# Altium PCB 顶板.PcbDoc
Units mil, origin at the board's own origin, x right, y up, seen from the top; angles counter-clockwise.
Board outline 3937.01 x 2732.13 mil, 2 copper layers (Top Layer, Bottom Layer); 55 components, 55 nets, 253 pads, 65 vias.
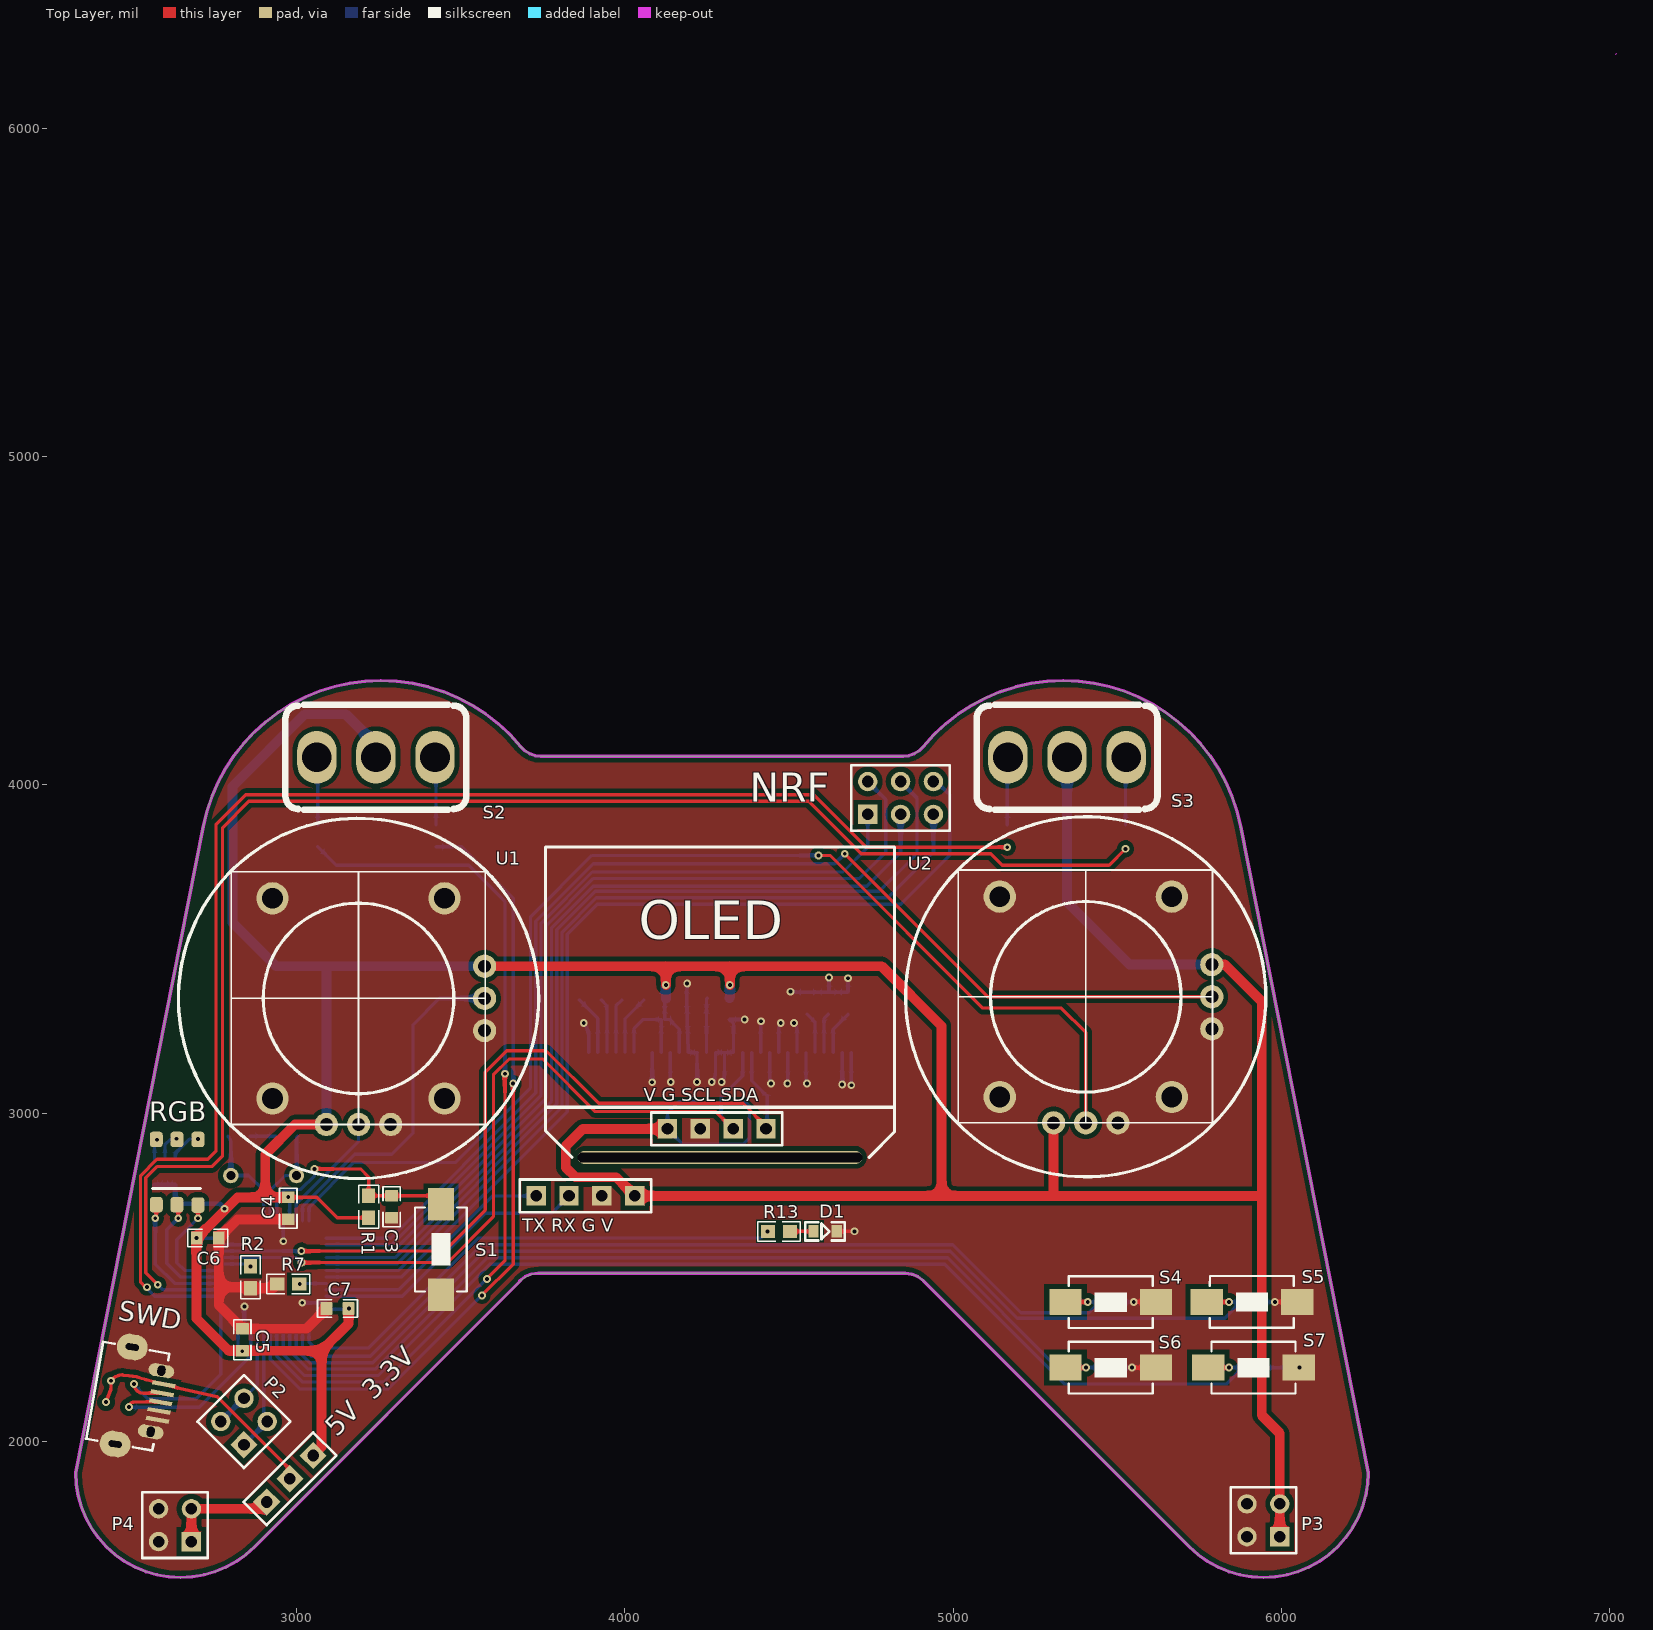
[diagram p0: Top Layer view]
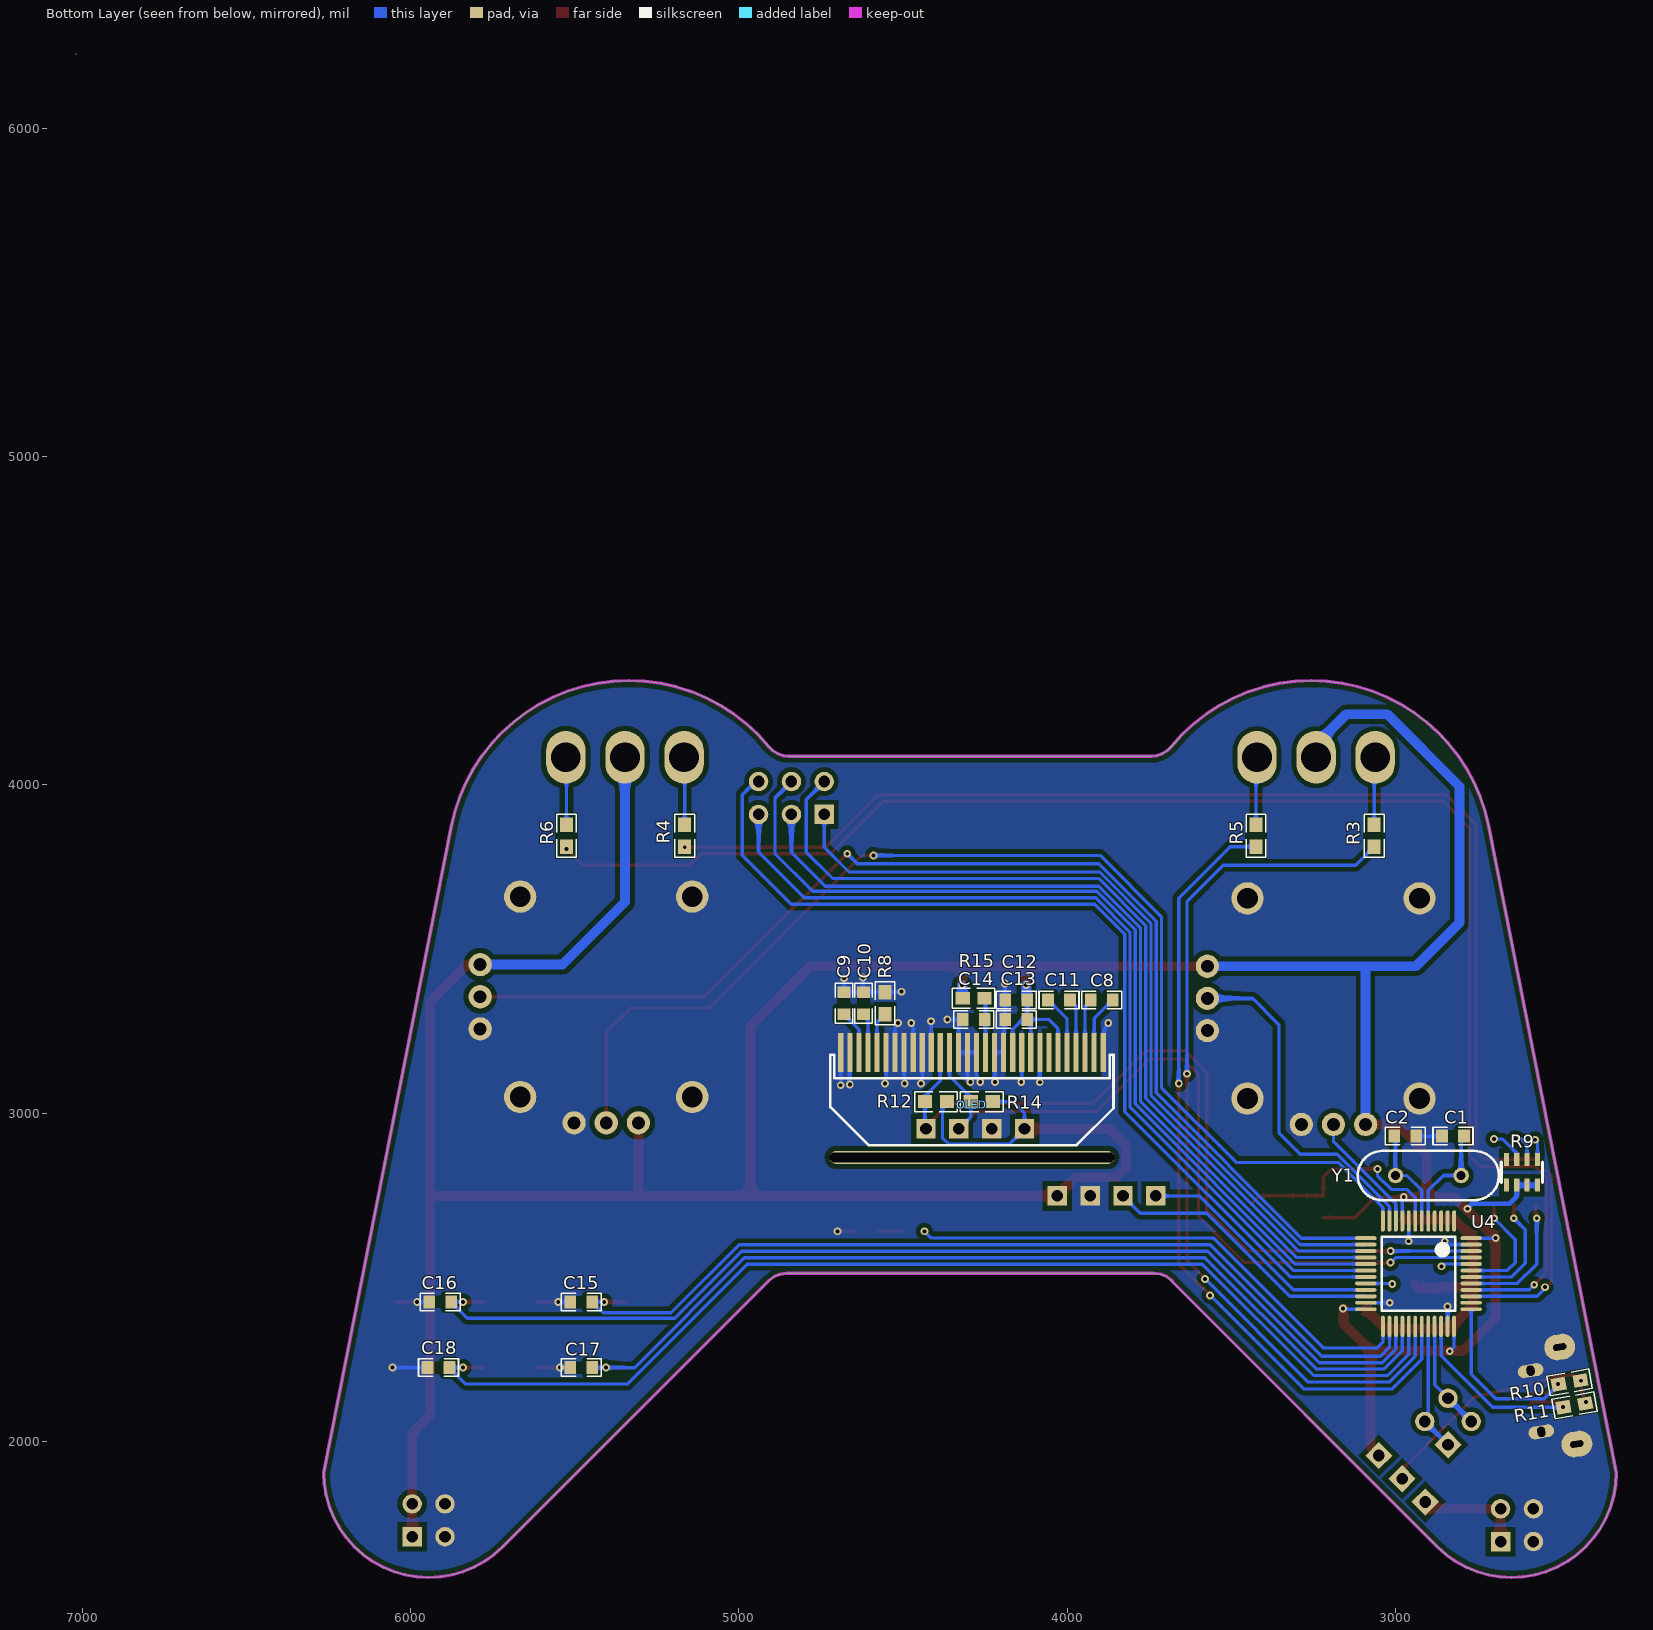
[diagram p1: Bottom Layer view, seen from below]

## Layer stack, top to bottom
Top Solder: solder mask 0.4, Solder Resist, Dk 3.5
Top Layer: signal copper 1.4
Dielectric 1: dielectric 12.6, FR-4, Dk 4.8
Bottom Layer: signal copper 1.4
Bottom Solder: solder mask 0.4, Solder Resist, Dk 3.5

## Board outline
2476.85,1634.61 2508.19,1617.3 2541.26,1603.6 2575.66,1593.69 2610.95,1587.69 2646.69,1585.69 2682.43,1587.69 2717.72,1593.69 2752.12,1603.6 2785.19,1617.3 2816.52,1634.61 2845.72,1655.33 2872.41,1679.18 3682.36,2489.13 3698.67,2501.65 3717.66,2509.51 3738.04,2512.2 4853.91,2512.2 4874.29,2509.51 4893.28,2501.65 4909.59,2489.13 5719.54,1679.18 5746.23,1655.33 5775.43,1634.61 5806.76,1617.3 5839.83,1603.6 5874.23,1593.69 5909.52,1587.69 5945.26,1585.69 5981,1587.69 6016.29,1593.69 6050.69,1603.6 6083.77,1617.3 6115.1,1634.61 6144.29,1655.33 6170.98,1679.18 6194.84,1705.87 6215.55,1735.07 6232.87,1766.4 6246.57,1799.47 6256.48,1833.87 6262.47,1869.16 6264.48,1904.9 5875.78,3873.41 5864.61,3919.45 5849.53,3964.37 5830.65,4007.83 5808.1,4049.5 5782.06,4089.08 5752.71,4126.28 5720.28,4160.83 5685.01,4192.46 5647.14,4220.94 5606.97,4246.07 5564.79,4267.65 5520.91,4285.53 5475.66,4299.57 5429.37,4309.68 5382.38,4315.78 5335.04,4317.81 5286.35,4315.66 5238.03,4309.21 5190.48,4298.52 5144.05,4283.67 5099.12,4264.77 5056.03,4241.98 5015.13,4215.47 4976.73,4185.45 4941.13,4152.16 4908.61,4115.85 4896.18,4103.7 4881.39,4094.58 4864.96,4088.92 4847.69,4087 3744.26,4087 3726.99,4088.92 3710.56,4094.58 3695.77,4103.7 3683.34,4115.85 3650.82,4152.16 3615.22,4185.45 3576.82,4215.47 3535.92,4241.98 3492.83,4264.77 3447.9,4283.67 3401.47,4298.52 3353.92,4309.21 3305.61,4315.66 3256.91,4317.81 3209.57,4315.78 3162.58,4309.68 3116.29,4299.57 3071.04,4285.53 3027.16,4267.65 2984.98,4246.07 2944.81,4220.94 2906.95,4192.46 2871.67,4160.83 2839.24,4126.28 2809.89,4089.08 2783.85,4049.5 2761.3,4007.83 2742.42,3964.37 2727.34,3919.45 2716.17,3873.41 2327.47,1904.9 2329.48,1869.16 2335.48,1833.87 2345.39,1799.47 2359.08,1766.4 2376.4,1735.07 2397.11,1705.87 2420.97,1679.18 2447.66,1655.33

## Design rules (kind name [scope] priority, off if disabled: settings)
Clearance [All] p1: gap=6
HoleSize [All] p1: absolutevalues=TRUE maxlimit=1000 minlimit=1 maxpercent=80.000 minpercent=20.000
HoleToHoleClearance [All] p1: gap=0 allowstackedmicrovias=TRUE
MinimumSolderMaskSliver [All] p1: minsoldermaskwidth=0
PolygonConnect [All] p1: connectstyle=Direct reliefconductorwidth=10 reliefentries=4 polygonreliefangle="90 Angle" airgapwidth=10
RoutingVias [All] p1: holewidth=28 width=50 viastyle="Through Hole" minholewidth=28 minwidth=50 maxholewidth=28 maxwidth=50
SilkToSilkClearance [All] p1: silktosilkclearance=0
SilkToSolderMaskClearance [IsPad] p1: minsilkscreentomaskgap=0 clearancetoexposedcopper=TRUE
SolderMaskExpansion [All] p1: expansion=4
Width [All] p1: maxlimit=100 minlimit=10 preferedwidth=10
25 further rules are at their usual default settings.

## Components (designator, comment, footprint, x,y, rotation, side; value= is the part's Value field where it differs from the comment)
"5V  3.3V" "H3" H3 2980,1885 r225 top (schematic designator H2)
C1 "CAP0603" CAP0603 2825,2930 r0 bottom
C2 "CAP0603" CAP0603 2970,2930 r180 bottom
C3 "CAP0603" CAP0603 3290,2715 r90 top
C4 "CAP0603" CAP0603 2975,2710 r90 top
C5 "CAP0603" CAP0603 2835,2310 r270 top
C6 "CAP0603" CAP0603 2730,2620 r180 top
C7 "CAP0603" CAP0603 3125,2405 r0 top
C8 "CAP0603" CAP0603 3895,3345 r180 bottom
C9 "CAP0603" CAP0603 4680,3335 r270 bottom
C10 "CAP0603" CAP0603 4620,3335 r270 bottom
C11 "CAP0603" CAP0603 4025,3345 r180 bottom
C12 "CAP0603" CAP0603 4155,3345 r0 bottom
C13 "CAP0603" CAP0603 4155,3285 r0 bottom
C14 "CAP0603" CAP0603 4285,3285 r180 bottom
C15 "CAP0603" CAP0603 5480,2424.68 r0 bottom
C16 "CAP0603" CAP0603 5910,2425 r0 bottom
C17 "CAP0603" CAP0603 5480,2225 r0 bottom
C18 "CAP0603" CAP0603 5915,2225 r0 bottom
D1 "LED" LED_0603_B 4610,2640 r0 top
NRF "Header 3X2" HDR2X3 4740,3910 r0 top (schematic designator P1)
OLED "OLED" OLED 4290,3025 r180 top (schematic designator U3)
P2 "Header 2X2" HDR2X2 2840,1990 r45 top
P3 "Header 2X2" HDR2X2 5995,1710 r90 top
P4 "Header 2X2" HDR2X2 2680,1695 r90 top
R1 "电阻R" R0603 3220,2715 r270 top
R2 "电阻R" R0603 2860,2500 r270 top
R3 "电阻R" R0603 3065,3845 r90 bottom
R4 "电阻R" R0603 5165,3845 r90 bottom
R5 "电阻R" R0603 3425,3845 r90 bottom
R6 "电阻R" R0603 5525,3845 r90 bottom
R7 "电阻R" R0603 2975,2480 r180 top
R8 "电阻R" R0603 4555,3335 r270 bottom
R9 "1K*4排阻" 1K*4排阻 2615,2820 r0 bottom
R10 "电阻R" R0603 2470,2180 r170 bottom
R11 "电阻R" R0603 2455,2110 r170 bottom
R12 "电阻R" R0603 4400,3035 r0 bottom
R13 "电阻R" R0603 4470,2640 r0 top
R14 "电阻R" R0603 4260,3035 r180 bottom
R15 "电阻R" R0603 4285,3350 r0 bottom
RGB "RGB5050" RGB5050 2640,2840 r90 top (schematic designator *2)
S1 "SWITCH" SWITCH 3440,2585 r0 top
S2 "拨动开关" 拨动开关 3240,4085 r180 top
S3 "拨动开关" 拨动开关 5345,4085 r180 top
S4 "SWITCH" SWITCH 5480,2424.68 r270 top
S5 "SWITCH" SWITCH 5910,2425 r270 top
S6 "SWITCH" SWITCH 5480,2225 r270 top
S7 "SWITCH" SWITCH 5915,2225 r270 top
SWD "MicroUSB（直插）" MicroUSB（直插） 2530,2130 r80 top (schematic designator *1)
"TX RX G V" "H4" H4 3880,2745 r180 top (schematic designator H3)
U1 "遥控器摇杆" 遥控器摇杆 3250,3310 r0 top
U2 "遥控器摇杆" 遥控器摇杆 5465,3315 r0 top
U4 "STM32F103C8T6" LQFP_48P 2930,2510 r270 bottom
"V G SCL SDA" "H4" H4 4280,2955 r0 top (schematic designator H1)
Y1 "XTAL" XTAL 2900,2810 r180 bottom

## Footprints (in the part's own frame and the unit in brackets; to place one, negate y for a bottom-side part, rotate by r counter-clockwise, add the part's x,y. Pads: shape width x height; smd on the part's side, far side on the other; paste and mask are expansions set on the pad)
1K*4排阻 [mm]
  rect 0.4x1 smd: 1(-1.2,1) 2(-1.2,-1) 3(-0.4,1) 4(-0.4,-1) 5(0.4,1) 6(0.4,-1) 7(1.2,1) 8(1.2,-1)
  silkscreen extent -1.6,-0.8 1.6,0.8, body extent -1.6,-0.84 1.6,0.84, height 0.5
CAP0603 [mm]
  round 0.254 on Mech14: 0(0,0)
  rrect10% 0.9x1 smd: 1(-0.85,0) 2(0.85,0)
  Top Layer pour cut-out: -0.5,0.5 0.5,0.5 0.5,-0.5 -0.5,-0.5
  silkscreen extent -1.55,-0.67 1.55,0.67, body extent -0.85,-0.45 0.85,0.45, height 0.89
H3 [mm] "排针"
  rect 1.5x1.5 hole 0.9: 1(-2.565,-0.025) 2(-0.025,-0.025) 3(2.515,-0.025)
  silkscreen extent -3.84,-1.3 3.78,1.24, body extent -3.84,-1.3 3.78,1.24, height 7.58
H4 [mm] "排针"
  rect 1.5x1.5 hole 0.9: 1(-3.81,-0.076) 2(-1.27,-0.076) 3(1.27,-0.076) 4(3.81,-0.076)
  silkscreen extent -5.08,-1.35 5.08,1.19, body extent -5.08,-1.35 5.08,1.19, height 7.58
HDR2X2 [mm] "Connector; Header; 2x2 Position"
  rect 1.5x1.5 hole 0.9: 1(0,0)
  round 1.5 hole 0.9: 2(0,2.54) 3(2.54,0) 4(2.54,2.54)
  silkscreen extent -1.27,-1.27 3.81,3.81
HDR2X3 [mm] "Connector; Header; 3x2 Position"
  rect 1.5x1.5 hole 0.9: 1(0,0)
  round 1.5 hole 0.9: 2(0,2.54) 3(2.54,0) 4(2.54,2.54) 5(5.08,0) 6(5.08,2.54)
  silkscreen extent -1.27,-1.27 6.35,3.81
LED_0603_B [mm]
  rect 0.8x0.95 smd: 1(-0.9,0) 2(0.9,0)
  silkscreen extent -1.52,-0.71 1.52,0.71, body extent -0.8,-0.43 0.8,0.41, height 0.8
LQFP_48P [mm]
  oval 1.65x0.3 smd: 1(-4.1,2.75) 2(-4.1,2.25) 3(-4.1,1.75) 4(-4.1,1.25) 5(-4.1,0.75) 6(-4.1,0.25) 7(-4.1,-0.25) 8(-4.1,-0.75) 9(-4.1,-1.25) 10(-4.1,-1.75) 11(-4.1,-2.25) 12(-4.1,-2.75) 25(4.05,-2.75) 26(4.05,-2.25) 27(4.05,-1.75) 28(4.05,-1.25) 29(4.05,-0.75) 30(4.05,-0.25) 31(4.05,0.25) 32(4.05,0.75) 33(4.05,1.25) 34(4.05,1.75) 35(4.05,2.25) 36(4.05,2.75)
  oval 0.3x1.65 smd: 13(-2.775,-4.075) 14(-2.275,-4.075) 15(-1.775,-4.075) 16(-1.275,-4.075) 17(-0.775,-4.075) 18(-0.275,-4.075) 19(0.225,-4.075) 20(0.725,-4.075) 21(1.225,-4.075) 22(1.725,-4.075) 23(2.225,-4.075) 24(2.725,-4.075) 37(2.725,4.075) 38(2.225,4.075) 39(1.725,4.075) 40(1.225,4.075) 41(0.725,4.075) 42(0.225,4.075) 43(-0.275,4.075) 44(-0.775,4.075) 45(-1.275,4.075) 46(-1.775,4.075) 47(-2.275,4.075) 48(-2.775,4.075)
  silkscreen extent -2.88,-2.85 2.82,2.85, body extent -4.53,-4.5 4.47,4.5, height 1.59
MicroUSB（直插） [mm]
  rect 0.35x1.8 smd: 1(1.4,-1.45) 2(0.7,-1.45) 3(0,-1.45) 4(-0.7,-1.45) 5(-1.4,-1.45)
  oval 2x2.4 hole 0.508 slot 1.016 at 90 deg unplated: 6(-3.81,1.45) 6(3.81,1.45)
  oval 1x2 hole 0.6 slot 0.8 at 0 deg: 6(-2.4,-1.09) 6(2.4,-1.09)
  silkscreen extent -3.81,-1.47 3.81,3.74, body extent -3.78,-1.93 3.84,3.71, height 1.27
OLED [mm]
  oval 22x1 hole 0.762 slot 22 at 0 deg: 0(0,4.063)
  rect 0.4x3 smd far side: 1(10.15,-4.062) 2(9.45,-4.062) 3(8.75,-4.062) 4(8.05,-4.062) 5(7.35,-4.062) 6(6.65,-4.062) 7(5.95,-4.062) 8(5.25,-4.062) 9(4.55,-4.062) 10(3.85,-4.062) 11(3.15,-4.062) 12(2.45,-4.062) 13(1.75,-4.062) 14(1.05,-4.062) 15(0.35,-4.062) 16(-0.35,-4.062) 17(-1.05,-4.062) 18(-1.75,-4.062) 19(-2.45,-4.062) 20(-3.15,-4.062) 21(-3.85,-4.062) 22(-4.55,-4.062) 23(-5.25,-4.062) 24(-5.95,-4.062) 25(-6.65,-4.062) 26(-7.35,-4.062) 27(-8.05,-4.062) 28(-8.75,-4.062) 29(-9.45,-4.062) 30(-10.15,-4.062)
  silkscreen extent -13.5,-19.96 13.5,4.04
R0603 [mm]
  rect 1.1x1 smd: 1(-0.85,0) 2(0.85,0)
  silkscreen extent -1.65,-0.76 1.65,0.76, body extent -0.8,-0.4 0.8,0.4, height 0.45
RGB5050 [mm]
  rrect50% 1.2x1 smd: 1(-3.019,1.702) 2(-3.019,0.102) 3(-3.044,-1.523) 4(2.031,-1.523) 5(2.031,0.102) 6(2.031,1.702)
  silkscreen extent -1.77,-1.7 -1.77,2, body extent -3.22,-2.4 2.28,2.6, height 1.51
SWITCH [mm]
  rect 2x2.5 smd: 1(0,3.5) 2(0,-3.5)
  silkscreen extent -2,-3.25 2,3.25, body extent -2.03,-3.23 2.03,3.25, height 1.2
XTAL [mm]
  round 1.2 hole 0.7: 1(-2.54,0) 2(2.54,0)
  silkscreen extent -5.46,-1.91 5.46,1.91, body extent -5.7,-2.29 5.65,2.36, height 3.52
拨动开关 [mil] "扭子拨动开关"
  oval 120x160 hole 90.55: 1(-182,1) 2(-2,1) 3(178,1)
  silkscreen extent -278,-158 274,160, body extent -280,-158 277,162, height 748
遥控器摇杆 [mm] "摇杆"
  round 2.5 hole 1.6: 0(-8.204,-6.744) 0(-8.204,8.75) 0(5.105,-6.744) 0(5.105,8.75)
  round 1.8 hole 1: 1(-4.039,-8.75) 2(-1.549,-8.75) 3(0.94,-8.75) 4(8.204,-1.486) 5(8.204,1.003) 6(8.204,3.493)
  silkscreen extent -15.48,-12.93 12.38,14.94

## Part data
"5V  3.3V" "TX RX G V" "V G SCL SDA": "排针"
NRF: "Header, 3-Pin, Dual row"
P2 P3 P4: "Header, 2-Pin, Dual row"
S1 S4 S5 S6 S7: "按键"
S2 S3: "扭子拨动开关"
U1 U2: "摇杆"
Y1: "晶振"

## Via types
v1: diameter 23.62, hole 11.81, Top Layer to Bottom Layer, tented both sides, 65 vias

## Nets (pads, with @x,y where several pads share a name; then routed paths per layer and width w, separated by ;. In a path a pad name is that pad's centre, name@x,y a point inside that pad or via, vN(x,y) a via of type N, cw(c..) or ccw(c..) an arc to the next point about the centre after c; other vN are vias at no path point)
ADC123_IN0: U1.2 U4.10 | length 372.8
  Bottom Layer w10: U4.10 2998.9,2723.9 3189,2914 U1.2
ADC123_IN1: U1.5 U4.11 | length 1054.8
  Bottom Layer w10: U4.11 3018.58,2716.21 3177.37,2875 3290,2875 3355,2940 3355,3270 3434.5,3349.5 U1.5
ADC123_IN2: U2.2 U4.12 | length 3654.9
  Top Layer w10: v1(4590,3785) 4625,3785 5090,3320 5330,3320 5404,3246 U2.2
  Bottom Layer w10: U4.12 3038.27,2713.27 3175,2850 3485,2850 3713,3078 3713,3598 3900,3785 v1(4590,3785)
ADC123_IN3: U2.5 U4.13 | length 3669.3
  Top Layer w10: v1(4670,3790) 5105.5,3354.5 U2.5
  Bottom Layer w10: U4.13 3286.64,2619.27 3729,3061.63 3729,3584.76 3904.24,3760 4640,3760 v1(4670,3790)
CAN-RX: P2.1 P2.3 U4.32 | length 394.1
  Bottom Layer w10: P2.1 P2.3 2900.47,2070.95 U4.32
CAN-TX: P2.2 P2.4 U4.33 | length 336
  Bottom Layer w10: P2.2 P2.4 2880.79,2172.21 U4.33
GND: "TX RX G V.2" "V G SCL SDA.2" C1.2 C2.2 C3.1 C4.1 C5.1 C6.1 C7.1 C9.1 C10.1 C12.2 C13.2 C14.1 C15.2 C16.2 C17.2 C18.2 D1.2 OLED.1 OLED.8 OLED.10 OLED.12 OLED.13 OLED.15 OLED.16 OLED.17 OLED.20 OLED.21 OLED.22 OLED.23 OLED.24 OLED.25 OLED.29 OLED.30 P3.2 P3.4 P4.2 P4.4 R2.2 R7.2 R8.1 S1.2 S4.1 S5.1 S6.1 S7.1 SWD.4 SWD.5 SWD.6 U1.0 U1.3 U1.4 U2.0 U2.3 U2.4 U4.8 U4.23 U4.35 U4.47 | length 3884.4
  Top Layer w10: SWD.6@2588.67,2215.6 SWD.6@2606.26,2205.12 ; D1.2 v1(4700,2640) ; v1(5545,2225) S6.1 ; v1(5550,2425) 5617.48,2425 S4.1 ; v1(5980,2425) S5.1
  Top Layer w30: R7.2 2928.07,2466.54 R2.2 2856.54,2470 2763.46,2470 ; C4.1 2820,2676.54 C6.1 2763.46,2470 ; C7.1 3030,2343.46 C5.1 2763.46,2415 2763.46,2470
  Bottom Layer w10: U4.47 2839.58,2599.58 v1(2850,2610) ; U4.35 v1(2841.42,2411.42) ; C1.2 C2.2 ; U4.8 2959.53,2610.47 v1(2960,2610) ; v1(3017.58,2422.42) U4.23 ; v1(3875,3275) cw(c3837.84,3237.84) 3890.39,3237.84 OLED.1 ; OLED.8 v1(4083.31,3094.09) ccw(c4089.09,3094.09) v1@4085,3090 ; OLED.10 4138.43,3098.8 ccw(c4143.8,3098.8) v1(4140,3095) ; v1(4190,3395) ccw(c4193.71,3391.29) 4188.46,3391.29 C12.2 4190.37,3285.06 OLED.12 OLED.13 ccw(c4223.76,3182.28) 4220,3182.28 v1(4220,3095) ; v1(4265,3095) ccw(c4237.91,3122.09) 4276.22,3122.09 OLED.15 OLED.16 ; v1(4295,3095) ccw(c4273.8,3116.2) 4303.78,3116.2 OLED.16 ; v1(4365,3285) C14.1 4331.34,3272.13 OLED.17 OLED.16 ; OLED.20 4414.02,3277.62 cw(c4417.38,3277.62) v1(4415,3280) ; OLED.21 4441.57,3098.27 ccw(c4453.27,3098.27) v1(4445,3090) ; OLED.22 4469.13,3260.84 cw(c4489.16,3260.84) v1(4475,3275) ; v1(4495,3090) ccw(c4490.91,3094.09) 4496.69,3094.09 OLED.23 ; v1(4505,3370) ccw(c4508.71,3373.71) 4508.71,3368.46 R8.1 C9.1 v1(4680,3411) ; v1(4515,3275) cw(c4492.66,3252.66) 4524.25,3252.66 OLED.24 ; OLED.25 4551.81,3097.7 ccw(c4562.7,3097.7) v1(4555,3090) ; C10.1 4622,3370.46 v1(4622,3413) ; v1(4662.05,3087.13) OLED.29 ; OLED.30 4689.61,3085.95 ccw(c4690.95,3085.95) v1(4690,3085) ; C17.2 v1(5545,2225) ; C15.2 5544.69,2424.68 v1@5545,2425 ; C16.2 v1(5980,2425) ; C18.2 v1(6055,2225)
LED: R13.1 U4.25 | length 1599.5
  Bottom Layer w10: U4.25 3038.27,2301.73 3055,2285 3220,2285 3555,2620 4415,2620 v1(4435,2640)
Net*1_1: "5V  3.3V.2" R10.2 R11.2 SWD.1 | length 746.7
  Top Layer w10: v1(2420,2120) 2434,2158 2435,2166 v1(2435,2185) 2445,2195 2448,2197 2451,2198 2455,2200 2460,2202 2469,2203 2472,2202 2478,2201 2490,2200 2501,2199 2508,2198 2513,2197 2529,2192 2536,2190 2538,2189 2542,2188 2558,2184 SWD.1 2629,2165 2758.5,2136.5 2980,1915 2980,1886.41
Net*2_4: R9.6 RGB.4 | length 105.5
  Bottom Layer w10: R9.6 2630.75,2877.75 2674,2921 v1(2700,2921)
Net*2_5: R9.4 RGB.5 | length 87.4
  Bottom Layer w10: R9.4 2599.25,2903.25 2618,2922 v1(2635,2922)
Net*2_6: R9.2 RGB.6 | length 60.8
  Bottom Layer w10: R9.2 2567.76,2912.76 v1@2573,2918
  other v1: 2575,2919
NetC1_1: C1.1 U4.5 Y1.2 | length 334.7
  Bottom Layer w10: C1.1 cw(c2771.1,2909.56) 2800,2909.56 Y1.2 2855,2810 2900.47,2764.53 U4.5
NetC2_1: C2.1 U4.6 Y1.1 | length 313.1
  Bottom Layer w10: U4.6 2920.16,2765.16 2965,2810 Y1.1 3000,2921.64 cw(c3011.83,2921.64) C2.1
NetC3_2: C3.2 R1.1 S1.1 U4.7 | length 696.5
  Top Layer w10: v1(3055,2830) 3195,2830 3220,2805 R1.1 C3.2 3414.33,2748.46 S1.1
  Bottom Layer w10: U4.7 2939.84,2742.1 2965.55,2767.81 3012.81,2767.81 3055,2810 v1(3055,2830)
NetC8_1: C8.1 OLED.3 | length 167.1
  Bottom Layer w10: C8.1 3945.51,3327.95 OLED.3
NetC8_2: C8.2 OLED.2 | length 183.4
  Bottom Layer w10: C8.2 3917.95,3288.58 OLED.2
NetC9_2: C9.2 OLED.28 | length 135.4
  Bottom Layer w10: OLED.28 4634.49,3256.02 C9.2
NetC10_2: C10.2 OLED.27 | length 122
  Bottom Layer w10: OLED.27 4606.93,3288.46 C10.2
NetC11_1: C11.1 OLED.5 | length 184
  Bottom Layer w10: OLED.5 4000.63,3287.17 C11.1
NetC11_2: C11.2 OLED.4 | length 167.7
  Bottom Layer w10: OLED.4 3973.07,3326.54 C11.2
NetC14_2: C14.2 OLED.14 R15.1 | length 166.2
  Bottom Layer w10: OLED.14 4248.66,3347.13 R15.1
NetD1_1: D1.1 R13.2 | length 71.1
  Top Layer w10: R13.2 D1.1
NetR2_1: R2.1 U4.44 | length 93.4
  Bottom Layer w10: U4.44 2852.94,2540.53 v1(2860,2533.46)
NetR3_2: R3.2 S2.3 | length 206.3
  Bottom Layer w10: S2.3 cw(c3054.76,4076.76) 3065,4076.76 R3.2
NetR4_2: R4.2 S3.3 | length 206.4
  Bottom Layer w10: R4.2 5165,4082 S3.3
NetR5_2: R5.2 S2.1 | length 206.3
  Bottom Layer w10: S2.1 cw(c3414.76,4076.76) 3425,4076.76 R5.2
NetR6_2: R6.2 S3.1 | length 206.4
  Bottom Layer w10: R6.2 5525,4082 S3.1
NetR7_1: R7.1 U4.20 | length 81
  Bottom Layer w10: v1(3010,2480) 3011.47,2481.47 U4.20
NetR8_2: OLED.26 R8.2 | length 126.7
  Bottom Layer w10: R8.2 4579.37,3277.17 OLED.26
NRF_CS: NRF.6 U4.19 | length 2999.2
  Bottom Layer w10: U4.19 3321.16,2501.16 3825,3005 3825,3545 3916.16,3636.16 4841.16,3636.16 4990,3785 4990,3970 4950,4010 NRF.6
NRF_CSN: NRF.1 U4.14 | length 2557.4
  Bottom Layer w10: U4.14 3289.58,2599.58 3745,3055 3745,3578.14 3901.45,3734.58 4664.58,3734.58 4740,3810 NRF.1
NRF_IRQ: NRF.5 U4.18 | length 2804.3
  Bottom Layer w10: U4.18 3310.84,2520.84 3809,3019 3809,3551.63 3913.22,3655.84 4800.84,3655.84 4940,3795 NRF.5
RGB1: RGB.1 U4.41 | length 406.2
  Top Layer w10: v1(2570,2680) 2573,2683 RGB.1
  Bottom Layer w10: v1(2570,2680) 2570,2540 2628.53,2481.47 U4.41
RGB2: RGB.2 U4.42 | length 376.6
  Top Layer w10: RGB.2 2640,2717.15 v1(2640,2680)
  Bottom Layer w10: v1(2640,2680) 2605,2645 2605,2542.37 2646.22,2501.16 U4.42
RGB3: RGB.3 U4.43 | length 346.7
  Top Layer w10: v1(2700,2680) RGB.3
  Bottom Layer w10: v1(2700,2680) 2635,2615 2635,2545 2659.16,2520.84 U4.43
SCL: "V G SCL SDA.3" OLED.18 R14.1 U4.45 | length 2440.2
  Top Layer w10: v1(3015,2545) 3460,2545 3600,2685 3600,3117.26 3647.74,3165 3750,3165 3910,3005 4277,3005 4330,2952
  Bottom Layer w10: U4.45 2999.79,2560.21 v1(3015,2545) ; 4330,2952 4293.46,2988.54 R14.1 4293.46,3048.46 4358.9,3113.9 OLED.18
SDA: "V G SCL SDA.4" OLED.19 R12.2 U4.46 | length 2516.4
  Top Layer w10: v1(3014.9,2579.9) 3449.9,2579.9 3575,2705 3575,3125 3640,3190 3760,3190 3920,3030 4360,3030 4430,2960 4430,2952
  Bottom Layer w10: U4.46 v1(3014.9,2579.9) v1@3015,2580 ; OLED.19 4386.46,3098.54 4433.46,3051.54 R12.2 4433.46,2955.46 4430,2952
SPI1_MISO: NRF.4 U4.17 | length 2868.4
  Bottom Layer w10: U4.17 3305.53,2540.53 3793,3028 3793,3558.25 3910.27,3675.53 4775.53,3675.53 4890,3790 4890,3960 NRF.4
SPI1_MOSI: NRF.3 U4.16 | length 2685.3
  Bottom Layer w10: U4.16 3300.21,2560.21 3777,3037 3777,3564.88 3903.65,3691.53 4736.53,3691.53 4840,3795 NRF.3
SPI1_SCK: NRF.2 U4.15 | length 2753.5
  Bottom Layer w10: U4.15 3294.9,2579.9 3761,3046 3761,3571.51 3904.39,3714.9 4714.9,3714.9 4795,3795 4795,3955 NRF.2
SWCLK: R10.1 SWD.2 U4.37 | length 615.8
  Top Layer w10: v1(2505,2175) ccw(c2532.77,2175) 2532.77,2147.23 SWD.2
  Bottom Layer w10: R10.1 2547.15,2130 2695,2130 2769.57,2204.57 U4.37
SWDIO: R11.1 SWD.3 U4.34 | length 632.4
  Top Layer w10: v1(2490,2105) cw(c2505.09,2105) 2505.09,2120.09 SWD.3
  Bottom Layer w10: R11.1 2704.19,2104.19 2861.1,2261.1 U4.34
USART3_RX: "TX RX G V.3" U4.22 | length 866.3
  Bottom Layer w10: U4.22 3322.1,2442.1 3575,2695 3777,2695 3830,2748
USART3_TX: "TX RX G V.4" U4.21 | length 758.1
  Bottom Layer w10: U4.21 3311.79,2461.79 3598,2748 3730,2748
USB_5V: "5V  3.3V.3" P4.1 P4.3 | length 337.9
  Top Layer w30: P4.1 P4.3 2888.59,1795 2909.29,1815.7
VCC-3.3V: "5V  3.3V.1" "TX RX G V.1" "V G SCL SDA.1" C4.2 C5.2 C6.2 C7.2 C12.1 C13.1 OLED.6 OLED.9 OLED.11 P3.1 P3.3 R1.2 R9.1 R9.3 R9.5 R12.1 R14.2 R15.2 S2.2 S3.2 U1.1 U1.6 U2.1 U2.6 U4.9 U4.24 U4.36 U4.48 | length 13787.2
  Top Layer w10: C4.2 3061.54,2743.46 3123.46,2681.54 R1.2
  Top Layer w30: C6.2@2695,2610 2695,2375 2793.46,2276.54 C5.2 3076.54,2276.54 ; v1(2695,2620) C6.2 2820,2743.46 2905,2743.46 ; C4.2 2905,2743.46 ; 3050.71,1957.12 3076.54,1982.95 3076.54,2276.54 ; U1.1 2995.5,2965.5 2905,2875 2905,2743.46 ; C7.2 3158.46,2358.46 3076.54,2276.54 ; U1.6 4125,3447.5 ; v1(4125,3390) 4125,3447.5 ; 4130,2952 3872,2952 3820,2900 3820,2835 3850,2805 3973,2805 4030,2748 4965,2748 ; v1(4320,3390) 4320,3447.5 ; U2.1 5306,2754 5300,2748 ; U2.6 5827.5,3452.5 5940,3340 5940,2755 ; P3.1 5995,2025 5940,2080 5940,2755 ; 4125,3447.5 4320,3447.5 ; 4320,3447.5 4782.5,3447.5 4965,3265 4965,2748 ; 4965,2748 5300,2748 ; 5300,2748 5933,2748 5940,2755
  Bottom Layer w10: v1(2695,2620) 2695.73,2619.27 U4.48 ; U4.36 2821.73,2288.27 v1(2835,2275) ; v1(2975,2745) 2979.21,2740.79 U4.9 ; U4.24 3157.73,2402.73 v1(3160,2405) ; OLED.6 4028.19,3258.19 4055,3285 4110.87,3285 OLED.9 ; C12.1@4125,3348.46 C12.1 C13.1 4136.54,3285 4165.98,3255.56 OLED.11 ; R14.2 4165,3035 4130,3000 4130,2952 4177,2905 4360,2905 4380,2925 4380,3021.54 R12.1
  Bottom Layer w15: R9.1 R9.3 R9.5 2630.75,2746.25 2653,2724 2767,2724 v1@2782,2709
  Bottom Layer w30: U1.1 3091,3438.5 3100,3447.5 ; S2.2 3242,4123 3150,4215 3025,4215 2805,3995 2805,3580 2937.5,3447.5 3100,3447.5 ; U1.6 3100,3447.5 ; C12.1@4125,3348.46 v1(4125,3390) ; R15.2 ccw(c4314.76,3353.71) 4320,3353.71 v1(4320,3390) ; S3.2 5347,3643 5537.5,3452.5 U2.6
  other v1: 2781,2709
按钮-PA8: C18.1 S7.2 U4.29 | length 3450.5
  Top Layer w10: S7.2 v1(5840,2225)
  Bottom Layer w10: U4.29 2959.53,2265.47 3024,2201 3249.52,2201 3588.52,2540 4975,2540 5340,2175 5831.54,2175 C18.1 v1(5840,2225)
按钮-PB13: C15.1 S4.2 U4.26 | length 2847.6
  Top Layer w10: S4.2 5342.52,2425 v1(5410,2425)
  Bottom Layer w10: U4.26 3018.58,2286.42 3045,2260 3225,2260 3564.06,2599.06 4999.46,2599.06 5206.76,2391.76 5413.61,2391.76 C15.1 5410.31,2424.68 v1(5410,2425)
按钮-PB14: C16.1 S5.2 U4.27 | length 3308.8
  Top Layer w10: S5.2 v1(5840,2425)
  Bottom Layer w10: U4.27 2998.9,2281.1 3040,2240 3232.84,2240 3572.21,2579.37 4991.31,2579.37 5194.92,2375.76 5827.29,2375.76 C16.1 v1@5845,2425
按钮-PB15: C17.1 S6.2 U4.28 | length 2906.5
  Top Layer w10: S6.2 v1(5405,2225)
  Bottom Layer w10: U4.28 2979.21,2275.79 3034,2221 3241.68,2221 3580.36,2559.69 4983.15,2559.69 5317.84,2225 v1(5405,2225) C17.1
按键PA8: R3.1 U4.30 | length 2705.2
  Top Layer w10: v1(3580,2495) 3635,2550 v1(3635,3120)
  Bottom Layer w10: U4.30 2939.84,2260.16 3019,2181 3266,2181 v1(3580,2495) ; R3.1 3121.54,3755 3525,3755 3635,3645 v1(3635,3120)
按键PA9: R5.1 U4.31 | length 2450
  Top Layer w10: v1(3565,2445) 3660,2540 v1(3660,3090)
  Bottom Layer w10: U4.31 2920.16,2249.84 3010,2160 3280,2160 v1(3565,2445) ; R5.1 3503.46,3811.54 3660,3655 v1(3660,3090)
按键PB3: R4.1 U4.39 | length 4359.9
  Top Layer w10: v1(2545,2470) 2540,2470 2525,2485 2525,2810 2575,2860 2730,2860 2755,2885 2755,3880 2845,3970 4575,3970 4735,3810 v1(5165,3810)
  Bottom Layer w10: v1(2545,2470) 2545,2465 2567.9,2442.1 U4.39
按键PB4: R6.1 U4.40 | length 4685.8
  Top Layer w10: v1(2577.5,2477.5) 2541,2514 2541,2803.37 2575,2837.37 2742.37,2837.37 2775,2870 2775,3870 2855,3950 4560,3950 4720,3790 5115,3790 5150,3755 5475,3755 v1(5525,3805)
  Bottom Layer w10: v1(2577.5,2477.5) 2593.21,2461.79 U4.40
pads on no net: C1.0 C2.0 C3.0 C4.0 C5.0 C6.0 C7.0 C8.0 C9.0 C10.0 C11.0 C12.0 C13.0 C14.0 C15.0 C16.0 C17.0 C18.0 OLED.0 OLED.7 R9.7 R9.8 U4.1 U4.2 U4.3 U4.4 U4.38

## Polygon pours and split planes (outlines as drawn)
GND on Top Layer "GND_L01_P006" (solid, remove dead copper, pour order 6): 2173,4072 2173,1474 6481,1474 6484,1471 6542,1529 6542,4392 2212,4392 2177,4427
GND on Bottom Layer "GND_L02_P008" (solid, remove dead copper, pour order 8): 2379,4457 2442,4520 6291,4520 6291,1494 6285,1488 6234,1539 2243,1539

## Keep-outs
Keep-Out Layer:
  lines w3.94: 7017.99,6227.01 7020,6225
  lines w10: 3679.7,2489.62 3696.01,2502.13 3715,2510 3735.38,2512.68 ; 3682.36,2489.13 2872.41,1679.18 2845.72,1655.33 2816.52,1634.61 2785.19,1617.3 2752.12,1603.6 2717.72,1593.69 2682.43,1587.69 2646.69,1585.69 2610.95,1587.69 2575.66,1593.69 2541.26,1603.6 2508.19,1617.3 2476.85,1634.61 2447.66,1655.33 2420.97,1679.18 2397.11,1705.87 2376.4,1735.07 2359.08,1766.4 2345.39,1799.47 2335.48,1833.87 2329.48,1869.16 2327.47,1904.9 2716.17,3873.41 2727.34,3919.45 2742.42,3964.37 2761.3,4007.83 2783.85,4049.5 2809.89,4089.08 2839.24,4126.28 2871.67,4160.83 2906.95,4192.46 2944.81,4220.94 2984.98,4246.07 3027.16,4267.65 3071.04,4285.53 3116.29,4299.57 3162.58,4309.68 3209.57,4315.78 3256.91,4317.81 3305.61,4315.66 3353.92,4309.21 3401.47,4298.52 3447.9,4283.67 3492.83,4264.77 3535.92,4241.98 3576.82,4215.47 3615.22,4185.45 3650.82,4152.16 3683.34,4115.85 3695.77,4103.7 3710.56,4094.58 3726.99,4088.92 3744.26,4087 4847.69,4087 4864.96,4088.92 4881.39,4094.58 4896.18,4103.7 4908.61,4115.85 4941.13,4152.16 4976.73,4185.45 5015.13,4215.47 5056.03,4241.98 5099.12,4264.77 5144.05,4283.67 5190.48,4298.52 5238.03,4309.21 5286.35,4315.66 5335.04,4317.81 5382.38,4315.78 5429.37,4309.68 5475.66,4299.57 5520.91,4285.53 5564.79,4267.65 5606.97,4246.07 5647.14,4220.94 5685.01,4192.46 5720.28,4160.83 5752.71,4126.28 5782.06,4089.08 5808.1,4049.5 5830.65,4007.83 5849.53,3964.37 5864.61,3919.45 5875.78,3873.41 6264.48,1904.9 6262.47,1869.16 6256.48,1833.87 6246.57,1799.47 6232.87,1766.4 6215.55,1735.07 6194.84,1705.87 6170.98,1679.18 6144.29,1655.33 6115.1,1634.61 6083.77,1617.3 6050.69,1603.6 6016.29,1593.69 5981,1587.69 5945.26,1585.69 5909.52,1587.69 5874.23,1593.69 5839.83,1603.6 5806.76,1617.3 5775.43,1634.61 5746.23,1655.33 5719.54,1679.18 4909.59,2489.13 4893.28,2501.65 4874.29,2509.51 4853.91,2512.2 3738.04,2512.2